# Altium PCB SAU-G0-EX_AHT-PL.PcbDoc
Units mm, origin at the board's own origin, x right, y up, seen from the top; angles counter-clockwise.
Board outline 18.66 x 19.5 mm, 2 copper layers (Top Layer, Bottom Layer), stack 0.909 mm thick; 20 components, 15 nets, 72 pads, 39 vias.
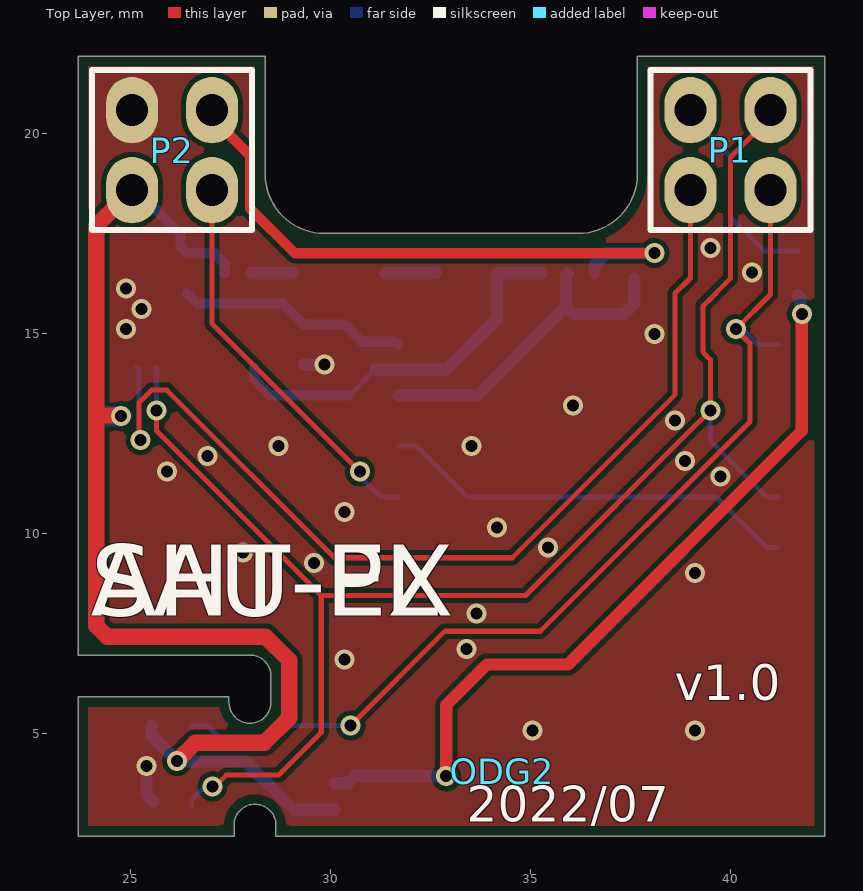
[diagram p0: Top Layer view]
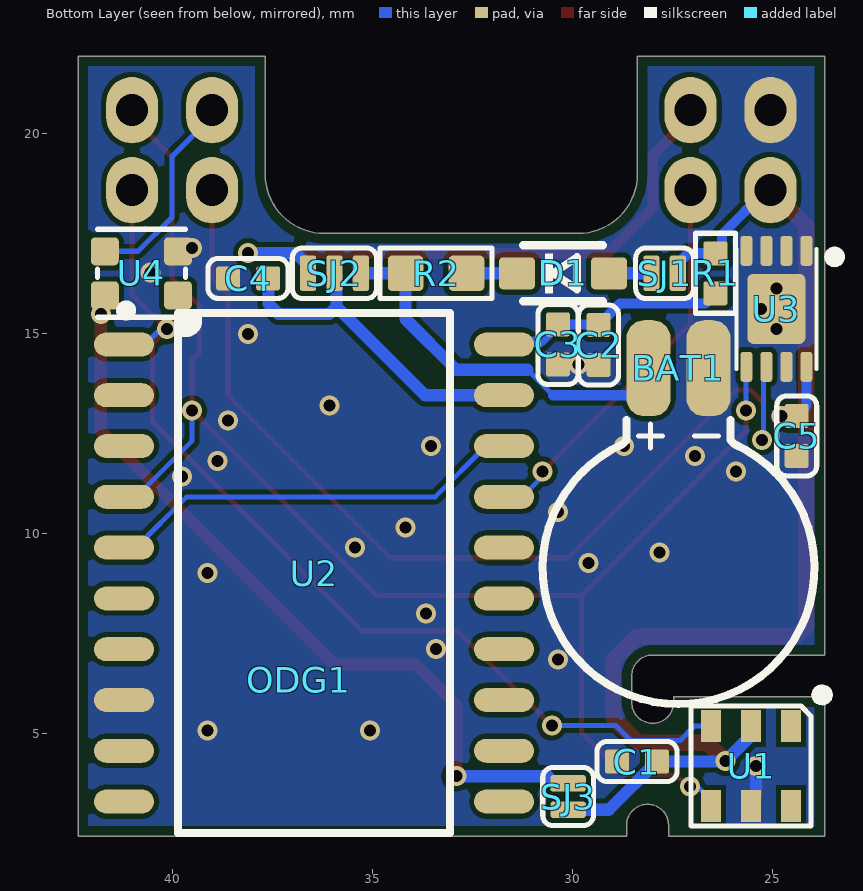
[diagram p1: Bottom Layer view, seen from below]

## Layer stack, top to bottom
Top Solder: solder mask 0.0102, Solder Resist, Dk 3.5
Top Layer: signal copper 0.0356
Dielectric 2: prepreg 0.0711, PP-006, Dk 4.1
Dielectric 1: dielectric 0.696, FR-4, Dk 4.8
Dielectric 3: prepreg 0.0711, PP-006, Dk 4.1
Bottom Layer: signal copper 0.0356
Bottom Solder: solder mask 0.0102, Solder Resist, Dk 3.5

## Board outline
23.688,2.438 27.588,2.438 27.588,2.712 cw(c28.112,2.712) 28.636,2.712 28.636,2.438 42.352,2.438 42.352,21.942 37.674,21.942 37.674,18.99 cw(c36.19,18.99) 36.19,17.506 29.85,17.506 cw(c29.85,18.99) 28.366,18.99 28.366,21.942 23.688,21.942 23.688,6.966 27.985,6.966 cw(c27.984,6.441) 28.509,6.442 28.509,5.785 cw(c27.985,5.785) 27.461,5.785 27.461,5.918 23.688,5.918

## Design rules (kind name [scope] priority, off if disabled: settings)
BoardOutlineClearance [All] p1: gap=0.254 ignorepadtopadclearanceinfootprint=FALSE except(0: Arc-SplitContinuation Track-SplitContinuation SMDPad-SplitContinuation THPad-SplitContinuation Via-SplitContinuation Fill-SplitContinuation Poly-SplitContinuation Region-SplitContinuation Text-SplitContinuation)
Clearance [All] p1: gap=0.127 ignorepadtopadclearanceinfootprint=FALSE except(0: Arc-Text Arc-Hole Track-Text Track-Hole SMDPad-Text SMDPad-Hole THPad-Text THPad-Hole Via-Text Via-Hole Fill-Text Fill-Hole Poly-Text Poly-Hole Region-Text Region-Hole Text-Text Text-Hole)
MinimumSolderMaskSliver [All] p1: minsoldermaskwidth=0
PlaneClearance [All] p1: clearance=0.254
PlaneConnect [All] p1: planeconnectstyle=Direct reliefexpansion=0.254 reliefentries=4 reliefconductorwidth=0.254 reliefairgap=0.254
PolygonConnect [All] p1: connectstyle=Direct reliefconductorwidth=0.254 reliefentries=4 polygonreliefangle="90 Angle" airgapwidth=0.254
RoutingVias [All] p1: holewidth=0.3 width=0.5 viastyle="Through Hole" minholewidth=0.3 minwidth=0.5 maxholewidth=5 maxwidth=5
SilkToSilkClearance [All] p1: silktosilkclearance=0
SilkToSolderMaskClearance [IsPad] p1: minsilkscreentomaskgap=0 clearancetoexposedcopper=TRUE
SolderMaskExpansion [All] p1: expansion=0.051 istentingtop=FALSE
Width [All] p1: maxlimit=2.54 minlimit=0.127 preferedwidth=0.127
25 further rules are at their usual default settings.

## Components (designator, comment, footprint, x,y, rotation, side; value= is the part's Value field where it differs from the comment)
BAT1 "BAT" MS621FE-FL11E 27.34,9.138 r90 bottom locked
C1 "100nF" C0402 28.379,4.304 r0 bottom value=0.1u
C2 "6.8uF" C0402 29.337,14.719 r270 bottom value=0.1u
C3 "100nF" C0402 30.353,14.732 r270 bottom value=0.1u
C4 "100nF" C0402 38.1,16.383 r0 bottom value=0.1u
C5 "100nF" C0402 24.384,12.446 r270 bottom value=0.1u
D1 "B5819WS" SOD-323 30.226,16.51 r0 bottom
ODG1 "ODG_LOGO" ODG_LOGO_soldermask 36.83,6.35 r180 bottom
ODG2 "ODG_LOGO" ODG_LOGO_soldermask 34.29,4.064 r0 top
P1 "Male" 2.0MM_MALE_2X2 40,19.59 r0 top locked
P2 "Male" 2.0mm_Male_2x2 26.04,19.59 r0 top locked
R1 "330R" R0402 26.416,16.51 r90 bottom value=22R
R2 "620R" R0603 33.401,16.51 r0 bottom value=22R
SJ1 "SJ_2P" SJ_2P_MINI 27.686,16.51 r180 bottom
SJ2 "SJ_3P" SJ_3P_MINI 35.941,16.51 r180 bottom
SJ3 "SJ_2P" SJ_2P_MINI 30.099,3.429 r90 bottom
U1 "AHT20" AHT20 25.527,4.191 r270 bottom
U2 "PCF2129" NXP_SO20 36.449,9.017 r180 bottom
U3 "DNP_24Cxx_8P_DFN8_1EP" DFN-8-1EP_3x2mm_P0.5mm_EP1.75x1.45mm 24.892,15.621 r270 bottom
U4 "WS2812" WS2812_2020 40.767,16.51 r0 bottom

## Footprints (in the part's own frame and the unit in brackets; to place one, negate y for a bottom-side part, rotate by r counter-clockwise, add the part's x,y. Pads: shape width x height; smd on the part's side, far side on the other; paste and mask are expansions set on the pad)
2.0MM_MALE_2X2 [mm]
  oval 1.3x1.66 hole 0.8: 1(-1,1) 2(1,1) 3(-1,-1) 4(1,-1)
  silkscreen extent -2,-2 2,2, body extent -2,-2 2,2, height 5.7
2.0mm_Male_2x2 [mm]
  oval 1.3x1.66 hole 0.8: 1(-1,1) 2(1,1) 3(-1,-1) 4(1,-1)
  silkscreen extent -2,-2 2,2, body extent -2,-2 2,2, height 5.7
AHT20 [mm]
  rect 0.8x0.5 smd: 1(-1,1) 2(-1,0) 3(-1,-1) 4(1,-1) 5(1,0) 6(1,1)
  silkscreen extent -2.03,-1.5 1.5,2.03, body extent -1.5,-1.5 1.5,1.5, height 1
C0402 [mm]
  rrect20% 0.6x0.6 smd: 1(-0.5,0) 2(0.5,0)
  silkscreen extent -1,-0.5 1,0.5, body extent -0.5,-0.26 0.5,0.26, height 0.52
DFN-8-1EP_3x2mm_P0.5mm_EP1.75x1.45mm [mm]
  rrect50% 0.75x0.3 smd: 1(-1.45,0.75) 2(-1.45,0.25) 3(-1.45,-0.25) 4(-1.45,-0.75) 5(1.45,-0.75) 6(1.45,-0.25) 7(1.45,0.25) 8(1.45,0.75)
  rrect20% 1.75x1.45 smd: 9(0,0)
  silkscreen extent -1.55,-1 1.5,1.71, body extent -1.5,-0.99 1.5,0.99, height 0.77
MS621FE-FL11E [mm] "3V可充电锂电池5.5mAH"
  rrect80% 2.4x1.1 smd: 1(5,0.75) 2(5,-0.75)
  silkscreen extent -3.4,-3.4 3.7,3.4, body extent -3.4,-3.4 5.9,3.4, height 2.8
NXP_SO20 [mm] "Footprint for reflow soldering of SOT163-1 (SO20) of PCF2129AT"
  oval 1.5x0.6 smd: 1(-4.75,5.715) 2(-4.75,4.445) 3(-4.75,3.175) 4(-4.75,1.905) 5(-4.75,0.635) 6(-4.75,-0.635) 7(-4.75,-1.905) 8(-4.75,-3.175) 9(-4.75,-4.445) 10(-4.75,-5.715) 11(4.75,-5.715) 12(4.75,-4.445) 13(4.75,-3.175) 14(4.75,-1.905) 15(4.75,-0.635) 16(4.75,0.635) 17(4.75,1.905) 18(4.75,3.175) 19(4.75,4.445) 20(4.75,5.715)
  silkscreen extent -4.83,-6.5 3.4,6.69, body extent -5.16,-6.4 5.16,6.4, height 2.65
ODG_LOGO_soldermask [mm]
R0402 [mm]
  rrect20% 0.6x0.6 smd: 1(-0.5,0) 2(0.5,0)
  silkscreen extent -1,-0.5 1,0.5, body extent -0.5,-0.25 0.5,0.25, height 0.35
R0603 [mil]
  rrect25% 35x35 smd: 1(-30,0) 2(30,0)
  silkscreen extent -55,-25 55,25, body extent -31,-16 31,16, height 18
SJ_2P_MINI [mil]
  rrect30% 16x35 smd: 1(-13,0) 2(13,0)
  silkscreen extent -29,-25 29,25
SJ_3P_MINI [mil]
  rrect30% 16x35 smd: 1(-26,0) 2(0,0) 3(26,0)
  silkscreen extent -42,-25 42,25
SOD-323 [mm]
  rrect25% 0.9x0.8 smd: 1(-1.15,0) 2(1.15,0)
  silkscreen extent -1,-0.7 1,0.7, body extent -1.36,-0.62 1.36,0.63, height 1.05
WS2812_2020 [mm]
  rrect30% 0.7x0.7 smd: 1(-0.915,0.55) 2(-0.915,-0.55) 3(0.915,-0.55) 4(0.915,0.55)
  silkscreen extent -1.37,-1.1 1.1,1.37, body extent -1.1,-1 1.1,1, height 0.56

## Part data
BAT1: "锂电池", Auther=JonesLee, Publish=11-4-2017
C1 C2 C3 C4 C5: library part CAP, "Capacitor"
D1: library part DIODE, "二极管"
P1 P2: library part CONN_2X2
R1 R2: library part RES, "Resistor"
SJ1 SJ3: "焊接跳线"
SJ2: "焊接跳线二选一"
U1: "线性稳压芯片", BOM名称=可调升压芯片, 学习资源=www.ooocke.com, 版权归属=源创客
U2: "RTC"
U3: library part 24Cxx_8P_DFN8_1EP

## Via types
v1: diameter 0.5, hole 0.3, Top Layer to Bottom Layer, tented both sides, 39 vias

## Nets (pads, with @x,y where several pads share a name; then routed paths per layer and width w, separated by ;. In a path a pad name is that pad's centre, name@x,y a point inside that pad or via, vN(x,y) a via of type N, cw(c..) or ccw(c..) an arc to the next point about the centre after c; other vN are vias at no path point)
3V3: C1.1 C5.1 P2.3 R1.2 SJ1.2 SJ3.1 U1.2 U3.8 | length 32.6
  Top Layer w0.406: v1(24.769,12.936) 24.751,12.954 24.146,12.954 ; P2.3 24.146,17.696 24.146,12.954 ; v1(26.162,4.318) 26.619,4.775 28.348,4.775 28.966,5.393 28.966,6.834 28.377,7.423 24.419,7.423 24.146,7.696 24.146,8.033 24.146,12.954
  Bottom Layer w0.254: U3.8 24.142,13.188 C5.1 ; P2.3 25.143,18.59 26.251,17.481 26.251,17.175 R1.2 27.097,17.01 27.356,16.751 SJ1.2
  Bottom Layer w0.305: U1.2 25.527,4.953 v1(26.162,4.318) 26.176,4.304 C1.1 29.084,3.099 SJ3.1
  Bottom Layer w0.508: C5.1 24.394,12.936 v1(24.769,12.936)
GND: BAT1.2 C1.2 C2.2 C3.2 C4.2 C5.2 P2.1 U1.5 U2.8 U3.1 U3.2 U3.3 U3.4 U3.7 U3.9 U4.2 | length 1.5
  Bottom Layer w0.305: v1(25.4,4.191) 25.4,3.473 U1.5@25.562,3.312 ; C2.2 29.339,14.222 29.843,14.222 v1(29.845,14.224)
  other v1: 35.052,5.08 39.116,5.08 30.353,6.858 33.401,7.112 33.655,8.001 39.116,9.017 29.591,9.271 27.813,9.525 35.433,9.652 34.163,10.16 30.353,10.541 39.751,11.43 25.908,11.557 38.862,11.811 26.924,11.938 28.702,12.192 33.528,12.192 38.608,12.827 36.068,13.208 38.1,14.986 24.892,15.113 25.273,15.621 24.892,16.129 40.538,16.535 39.497,17.145
GPIO_ndef: P2.4 U2.17 | length 9.9
  Top Layer w0.127: P2.4 27.04,15.251 v1(30.734,11.557)
  Bottom Layer w0.127: v1(30.734,11.557) 30.734,11.433 31.245,10.922 U2.17
NetC2_1: C2.1 C3.1 R1.1 U2.20 | length 5.8
  Bottom Layer w0.254: R1.1 26.675,15.752 28.805,15.752 C2.1 29.343,15.226 30.347,15.226 C3.1 30.787,14.798 31.633,14.798 U2.20
NetC4_1: C4.1 SJ2.2 U2.19 | length 8.5
  Bottom Layer w0.305: U2.19 33.68,13.462 35.89,15.673 ; SJ2.2 35.89,16.459 35.89,15.673 ; C4.1 37.592,16.375 37.592,15.748 37.338,15.494 36.069,15.494 35.89,15.673
NetD1_1: D1.1 SJ1.1 | length 1.1
  Bottom Layer w0.305: SJ1.1 D1.1
NetD1_2: D1.2 R2.1 | length 1.3
  Bottom Layer w0.305: D1.2 R2.1
NetSJ3_2: SJ3.2 U4.4 | length 19.8
  Top Layer w0.305: v1(32.893,3.937) 32.893,5.715 33.909,6.731 35.941,6.731 41.783,12.573 v1(41.783,15.494)
  Bottom Layer w0.305: SJ3.2 30.429,3.759 30.607,3.937 v1(32.893,3.937) ; U4.4 41.746,15.896 41.746,15.531 v1(41.783,15.494)
NetU2_5: U2.5 U2.18 | length 10.6
  Bottom Layer w0.127: U2.18 32.152,12.192 33.422,10.922 39.634,10.922 40.904,9.652 U2.5
PB6/MISO2: P1.3 U3.6 | length 25.1
  Top Layer w0.127: v1(25.253,12.345) 25.214,12.384 25.214,13.276 25.527,13.589 25.908,13.589 30.099,9.398 34.544,9.398 38.608,13.462 38.608,16.002 39,16.394 P1.3
  Bottom Layer w0.127: U3.6 25.214,14.099 25.214,12.384 v1(25.253,12.345)
SCL1/SCK2: P1.4 U1.3 U2.1 | length 24.9
  Top Layer w0.127: v1(30.505,5.207) 32.859,7.561 35.247,7.561 40.488,12.802 40.488,14.757 v1(40.132,15.113) 41,15.981 P1.4
  Bottom Layer w0.127: U1.3 26.94,5.191 27.305,4.826 28.525,4.826 28.906,5.207 v1(30.505,5.207) ; v1(40.132,15.113) 40.203,15.042 40.365,15.042 40.675,14.732 U2.1
SDA1/MOSI2: P1.2 U1.4 U2.4 U3.5 | length 37.9
  Top Layer w0.127: v1(25.654,13.081) 25.654,12.57 29.769,8.455 ; v1(27.051,3.683) 27.114,3.683 27.394,3.962 28.702,3.962 29.769,5.029 29.769,8.455 ; P1.2 41,20.41 40.005,19.415 40.005,16.383 39.31,15.688 39.31,14.538 39.497,14.351 v1(39.497,13.078) 34.875,8.455 29.769,8.455
  Bottom Layer w0.127: U3.5 25.648,14.165 25.648,13.087 v1(25.654,13.081) ; U1.4 26.527,3.341 26.869,3.683 v1(27.051,3.683) ; v1(39.497,13.078) 39.497,12.321 40.896,10.922 U2.4
SPI2_NSS: P1.1 U4.3 | length 5.1
  Bottom Layer w0.127: P1.1 39,20.436 40.005,19.431 40.005,17.907 40.852,17.06 U4.3
Vbat_button: BAT1.1 R2.2 SJ2.3 | length 9.6
  Bottom Layer w0.127: 30.48,13.462 31.115,14.097
  Bottom Layer w0.254: BAT1.1 28.09,13.861 28.489,13.462 30.48,13.462
  Bottom Layer w0.305: 31.115,14.097 32.893,14.097 34.163,15.367 R2.2 SJ2.3
VbatWeek: P2.2 SJ2.1 | length 15.2
  Top Layer w0.254: P2.2 27.04,20.41 27.985,19.464 27.985,18.138 29.112,17.012 v1@38.1,17.012
  Bottom Layer w0.305: SJ2.1 36.601,16.71 36.903,17.012 v1@38.1,17.012
  other v1: 38.1,17.018
pads on no net: U1.1 U1.6 U2.2 U2.3 U2.6 U2.7 U2.9 U2.10 U2.11 U2.12 U2.13 U2.14 U2.15 U2.16 U4.1

## Polygon pours and split planes (outlines as drawn)
GND on Top Layer "vcc-2" (solid, remove dead copper, pour order 36): 23.79,21.84 42.25,21.84 42.25,2.54 23.79,2.54
GND on Bottom Layer "vcc-2" (solid, remove dead copper, pour order 28): 23.79,21.84 42.25,21.84 42.25,2.54 23.79,2.54

## Silkscreen, mask and mechanical layers (free items; w line width, h text height)
Top Overlay:
  text "AHT-PL" at 24.003,7.366 h3.05
  text "SAU-EX" at 24.003,7.366 h3.05
  text "v1.0" at 38.608,5.842 h0.89
  text "2022/07" at 33.401,2.794 h0.89
Mechanical 1:
  the board outline again, w0.152
Mechanical 2:
  lines w0.152: 23.688,12.19 42.352,12.19 ; 33.02,2.438 33.02,21.942
Mechanical 15:
  circle w0.127: c26.959,7.106 r2.9
  rectangle: 24.038,2.824 29.838,11.424